# EAGLE board CT_schematic (EAGLE 7.6.0)

Size 100 x 80 mm. Coordinates in mm from the lower left corner, seen from the top.
Outline: 0,0 100,0 100,80 0,80 0,0
Copper layers (1*16): Top 0.035mm / dielectric 1.5mm / Bottom 0.035mm
Design rules "default": minimum track width 10mil, minimum drill 24mil, track to track 8mil, track to pad 8mil, pad to pad 8mil, via to via 8mil, smd to smd 8mil, copper to edge 40mil, drill to drill 8mil, minimum pad ring 10mil, minimum via ring 8mil, stop-mask expansion 4mil, vias tented up to drill 0mil, thermal gap 10mil

## Footprints (pad centres in the part's own frame; a part is rotated, then mirrored left to right if it is on the bottom)
C0603 = smd 0.8 x 0.8: 1 -0.762,0; 2 0.762,0
C0402 = smd 0.5 x 0.5: 1 -0.508,0; 2 0.508,0
C1206 = smd 1.3 x 1.6: 1 -1.524,0; 2 1.524,0
C1210 = smd 1.2 x 2.5: 1 -1.524,0; 2 1.524,0
EXV-9H = smd 3.505 x 1.676: 1 -2.857,0; 2 2.857,0
L0603 = smd 0.8 x 0.8: 1 -0.762,0; 2 0.762,0
PJ-037B_PACKAGE = drill 3.7 square: 1 12,0 | drill 3.2 square: 2 6,0
R0603 = smd 0.8 x 0.8: 1 -0.762,0; 2 0.762,0
LQFP32 = smd 0.54 x 0.85: 1 -2.8,-4.275; 2 -2,-4.275; 3 -1.2,-4.275; 4 -0.4,-4.275; 5 0.4,-4.275; 6 1.19,-4.275; 7 1.99,-4.275; 8 2.79,-4.275; 17 2.8,4.275; 18 2,4.275; 19 1.2,4.275; 20 0.4,4.275; 21 -0.4,4.275; 22 -1.2,4.275; 23 -2,4.275; 24 -2.8,4.275 | smd 0.85 x 0.54: 9 4.275,-2.8; 10 4.275,-2; 11 4.275,-1.2; 12 4.275,-0.4; 13 4.275,0.4; 14 4.275,1.2; 15 4.275,2; 16 4.275,2.8; 25 -4.275,2.8; 26 -4.275,2; 27 -4.275,1.2; 28 -4.275,0.4; 29 -4.275,-0.4; 30 -4.275,-1.2; 31 -4.275,-2; 32 -4.275,-2.8
TSSOP20-I = smd 0.4 x 1.35: 1 -2.925,-2.875; 2 -2.275,-2.875; 3 -1.625,-2.875; 4 -0.975,-2.875; 5 -0.325,-2.875; 6 0.325,-2.875; 7 0.975,-2.875; 8 1.625,-2.875; 9 2.275,-2.875; 10 2.925,-2.875; 11 2.925,2.875; 12 2.275,2.875; 13 1.625,2.875; 14 0.975,2.875; 15 0.325,2.875; 16 -0.325,2.875; 17 -0.975,2.875; 18 -1.625,2.875; 19 -2.275,2.875; 20 -2.925,2.875
HTSS-105-01-G-D = drill 1 pad 1.8 square: 1 0,0 | drill 1 pad 1.8: 2 0,2.54; 3 2.54,0; 4 2.54,2.54; 5 5.08,0; 6 5.08,2.54; 7 7.62,0; 8 7.62,2.54; 9 10.16,0; 10 10.16,2.54
ABLS-25.000MHZ-B2F-T = smd 5.6 x 2.8: 1 -3.81,0; 2 5.69,0
WSON-8 = smd 0.3 x 0.6: 1 -0.75,0; 2 0.05,0; 3 0.85,0; 4 1.65,0; 5 1.65,3.8; 6 0.85,3.8; 7 0.05,3.8; 8 -0.75,3.8 | smd 3 x 2.6: PAD 0.45,1.9
SON-6 = smd 0.55 x 0.3: 1 -0.355,0.5 | smd 0.52 x 0.3: 2 -0.37,0; 3 -0.37,-0.5; 4 0.37,-0.5; 5 0.37,0; 6 0.37,0.5
SW_4-1437565-2 = smd 1.4 x 2.1: 1 -2.23,4.55; 2 -2.23,-4.55; 3 2.23,4.55; 4 2.23,-4.55
LGM67K-G1J2-24-Z = smd 0.8 x 1.4: A -2,0; C 0,0
NC7SZ125M5X = smd 1.3 x 0.7: 1 -1.3,0.95; 2 -1.3,0; 3 -1.3,-0.95; 4 1.3,-0.95; 5 1.3,0.95

## Placement (x,y rotation side)
C1  1e-07  [C0603]  -15.24,53.34 0 top  (outside the outline)
C2  1e-07  [C0603]  -19.05,53.34 0 top  (outside the outline)
C3  4.7e-06  [C0603]  -62.23,46.99 0 top  (outside the outline)
C4  1e-08  [C0603]  -22.86,53.34 0 top  (outside the outline)
C5  1e-08  [C0603]  -26.67,53.34 0 top  (outside the outline)
C6  1e-06  [C0603]  -30.48,53.34 0 top  (outside the outline)
C7  1e-11  [C0402]  -60.96,52.07 0 top  (outside the outline)
C8  1e-11  [C0402]  -15.24,58.42 0 top  (outside the outline)
C9  1e-07  [C0402]  -19.05,58.42 0 top  (outside the outline)
C10  1e-07  [C0402]  -22.86,58.42 0 top  (outside the outline)
C11  1e-07  [C0402]  -26.67,58.42 0 top  (outside the outline)
C12  1e-07  [C0402]  -30.48,58.42 0 top  (outside the outline)
C13  1e-07  [C0402]  -34.29,58.42 0 top  (outside the outline)
C14  1e-07  [C0402]  -38.1,58.42 0 top  (outside the outline)
C15  1e-07  [C0402]  -41.91,58.42 0 top  (outside the outline)
C16  1e-07  [C0402]  -45.72,58.42 0 top  (outside the outline)
C17  1e-07  [C0402]  -49.53,58.42 0 top  (outside the outline)
C18  1e-07  [C0402]  -53.34,58.42 0 top  (outside the outline)
C19  1e-07  [C0402]  -57.15,58.42 0 top  (outside the outline)
C20  1e-07  [C0402]  -60.96,58.42 0 top  (outside the outline)
C21  1e-08  [C0402]  -15.24,63.5 0 top  (outside the outline)
C22  1e-05  [C1206]  -16.51,46.99 0 top  (outside the outline)
C23  1e-05  [C1210]  -59.69,39.37 0 top  (outside the outline)
C24  1e-07  [C0402]  -19.05,63.5 0 top  (outside the outline)
C25  0.0001  [EXV-9H]  -55.88,30.48 0 top  (outside the outline)
C26  0.0001  [EXV-9H]  -17.78,40.64 0 top  (outside the outline)
C27  1e-08  [C0402]  -22.86,63.5 0 top  (outside the outline)
F1  240.0  [L0603]  -34.29,53.34 0 top  (outside the outline)
J1  PJ-037B  [PJ-037B_PACKAGE]  -43.18,7.62 0 top  (outside the outline)
R1  10000.0  [R0603]  -43.18,46.99 0 top  (outside the outline)
R2  1000.0  [R0603]  -38.1,53.34 0 top  (outside the outline)
R3  1600.5  [R0603]  -41.91,53.34 0 top  (outside the outline)
R4  4700.0  [R0603]  -45.72,53.34 0 top  (outside the outline)
R5  10000.0  [R0603]  -48.26,46.99 0 top  (outside the outline)
R6  100000.0  [R0603]  -27.94,46.99 0 top  (outside the outline)
R7  2231.0  [R0603]  -49.53,53.34 0 top  (outside the outline)
R8  1000.0  [R0603]  -53.34,53.34 0 top  (outside the outline)
R9  10000.0  [R0603]  -53.34,46.99 0 top  (outside the outline)
R10  10000.0  [R0603]  -58.42,46.99 0 top  (outside the outline)
R11  9100.0  [R0603]  -57.15,53.34 0 top  (outside the outline)
R12  680000.0  [R0603]  -33.02,46.99 0 top  (outside the outline)
R13  120000.0  [R0603]  -38.1,46.99 0 top  (outside the outline)
U1  stm32f051k8t6  [LQFP32]  -22.86,7.62 0 top  (outside the outline)
U2  SP3203ECY-L/TR  [TSSOP20-I]  -24.13,20.32 0 top  (outside the outline)
U3  HTSS-105-01-G-D  [HTSS-105-01-G-D]  -58.42,19.05 0 top  (outside the outline)
U4  SP3203ECY-L/TR  [TSSOP20-I]  -39.37,20.32 0 top  (outside the outline)
U5  HTSS-105-01-G-D  [HTSS-105-01-G-D]  -27.94,30.48 0 top  (outside the outline)
U6  ABLS-25.000MHZ-B2F-T  [ABLS-25.000MHZ-B2F-T]  -36.83,40.64 0 top  (outside the outline)
U7  LP3878SDX-ADJ/NOPB  [WSON-8]  -48.26,29.21 0 top  (outside the outline)
U8  TPS3895ADRYR  [SON-6]  -25.4,62.23 0 top  (outside the outline)
U9  4-1437565-2  [SW_4-1437565-2]  -59.69,6.35 0 top  (outside the outline)
U10  Q65110A2395  [LGM67K-G1J2-24-Z]  -48.26,40.64 0 top  (outside the outline)
U11  nc7sz125m5x  [NC7SZ125M5X]  -21.59,46.99 0 top  (outside the outline)

## Library data of the parts
C1-C27 F1 J1 R1-R13 U1-U11 = circuit_tree

## Nets
CLK_CRYSTAL_U1_2: C7.1 U1.2 U6.1
CLK_CRYSTAL_U1_3: C8.1 U1.3 U6.2
GND: C1.2 C2.2 C3.2 C4.2 C5.2 C6.2 C7.2 C8.2 C9.2 C10.2 C13.2 C14.2 C15.2 C16.2 C19.2 C20.2 C21.2 C22.2 C23.2 C24.2 C25.2 C26.2 C27.2 J1.2 R2.2 R5.2 R8.2 R11.2 R13.2 U1.16 U1.32 U2.18 U3.9 U4.18 U5.9 U7.3 U7.PAD U8.2 U10.C U11.1 U11.3
NET_U1_4: R4.1 U1.4 U11.4
NET_U1_5: C4.1 C5.1 C6.1 F1.1 U1.5
NET_U1_29: R3.1 U1.29 U10.A
NET_U1_30: R1.1 U1.30 U9.3 U9.4
NET_U1_31: R5.1 U1.31
NET_U2_1: C11.1 U2.1
NET_U2_2: C13.1 U2.2
NET_U2_3: C11.2 U2.3
NET_U2_4: C12.1 U2.4
NET_U2_5: C12.2 U2.5
NET_U2_6: C14.1 U2.6
NET_U2_20: U2.20
NET_U3_3: U2.14 U3.3
NET_U3_4: U2.13 U3.4
NET_U3_5: U2.17 U3.5
NET_U3_6: U2.16 U3.6
NET_U4_1: C17.1 U4.1
NET_U4_2: C19.1 U4.2
NET_U4_3: C17.2 U4.3
NET_U4_4: C18.1 U4.4
NET_U4_5: C18.2 U4.5
NET_U4_6: C20.1 U4.6
NET_U4_20: U4.20
NET_U5_3: U4.14 U5.3
NET_U5_4: U4.13 U5.4
NET_U5_5: U4.17 U5.5
NET_U5_6: U4.16 U5.6
NET_U7_1: C21.1 U7.1
NET_U7_6: R7.2 R8.1 U7.6
NET_U7_8: R6.1 U7.8
NET_U8_1: R10.1 R11.1 U8.1
NET_U8_3: R12.2 R13.1 U8.3
NET_U8_4: R9.1 U8.4 U11.2
NET_U9_1: R2.1 U9.1 U9.2
PROC_USART1_CTS: U1.21 U2.8
PROC_USART1_RTS: U1.22 U2.10
PROC_USART1_RX: U1.20 U2.11
PROC_USART1_TX: U1.19 U2.7
PROC_USART2_CTS: U1.6 U4.8
PROC_USART2_RTS: U1.7 U4.10
PROC_USART2_RX: U1.9 U4.11
PROC_USART2_TX: U1.8 U4.7
VCC_S1_7V8: C22.1 C25.1 C26.1 J1.1 R6.2 U7.4
VCC_TIER1_3V3: C1.1 C2.1 C3.1 C9.1 C10.1 C15.1 C16.1 C23.1 C24.1 C27.1 F1.2 R1.2 R3.2 R4.2 R7.1 R9.2 R10.2 R12.1 U1.1 U1.17 U2.12 U2.19 U4.12 U4.19 U7.5 U8.6 U11.5

## Tracks (layer width: path | path; a pad name or v marks a point on that pad's centre or on a via)
CLK_CRYSTAL_U1_2  (2 unrouted)
CLK_CRYSTAL_U1_3  (2 unrouted)
GND  (40 unrouted)
NET_U1_4  (2 unrouted)
NET_U1_5  (4 unrouted)
NET_U1_29  (2 unrouted)
NET_U1_30  (3 unrouted)
NET_U1_31  (1 unrouted)
NET_U2_1  (1 unrouted)
NET_U2_2  (1 unrouted)
NET_U2_3  (1 unrouted)
NET_U2_4  (1 unrouted)
NET_U2_5  (1 unrouted)
NET_U2_6  (1 unrouted)
NET_U3_3  (1 unrouted)
NET_U3_4  (1 unrouted)
NET_U3_5  (1 unrouted)
NET_U3_6  (1 unrouted)
NET_U4_1  (1 unrouted)
NET_U4_2  (1 unrouted)
NET_U4_3  (1 unrouted)
NET_U4_4  (1 unrouted)
NET_U4_5  (1 unrouted)
NET_U4_6  (1 unrouted)
NET_U5_3  (1 unrouted)
NET_U5_4  (1 unrouted)
NET_U5_5  (1 unrouted)
NET_U5_6  (1 unrouted)
NET_U7_1  (1 unrouted)
NET_U7_6  (2 unrouted)
NET_U7_8  (1 unrouted)
NET_U8_1  (2 unrouted)
NET_U8_3  (2 unrouted)
NET_U8_4  (2 unrouted)
NET_U9_1  (2 unrouted)
PROC_USART1_CTS  (1 unrouted)
PROC_USART1_RTS  (1 unrouted)
PROC_USART1_RX  (1 unrouted)
PROC_USART1_TX  (1 unrouted)
PROC_USART2_CTS  (1 unrouted)
PROC_USART2_RTS  (1 unrouted)
PROC_USART2_RX  (1 unrouted)
PROC_USART2_TX  (1 unrouted)
VCC_S1_7V8  (5 unrouted)
VCC_TIER1_3V3  (26 unrouted)